# EAGLE board Microsecond clock LEDs (EAGLE 9.5.2)
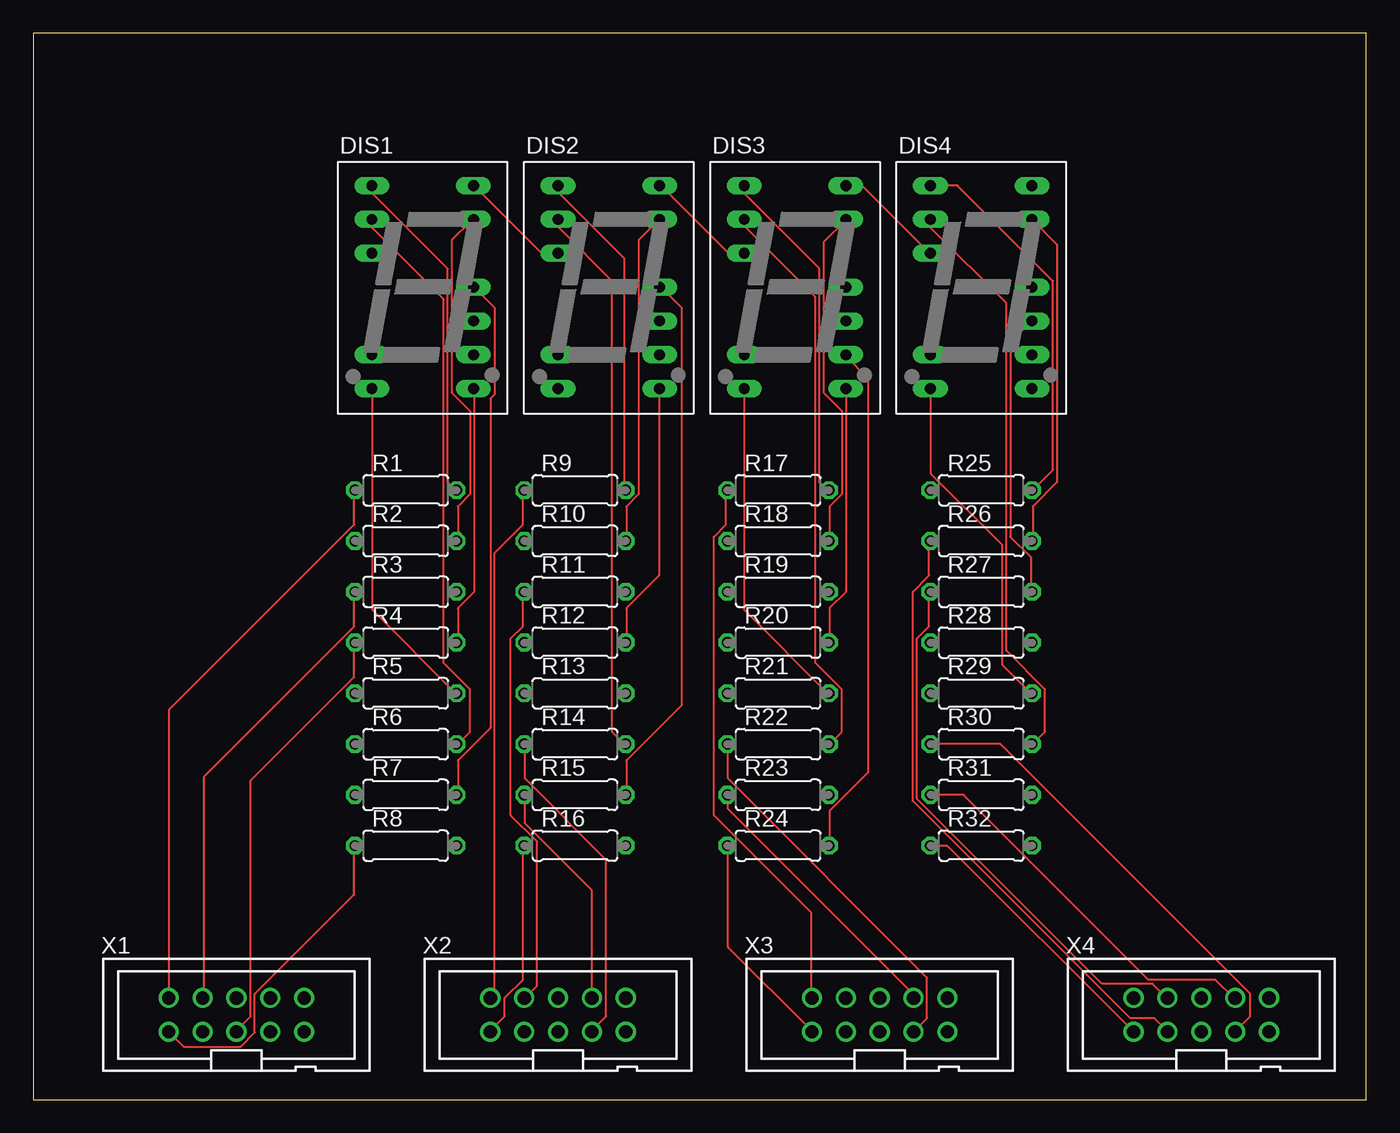
[diagram p0: board, top side]
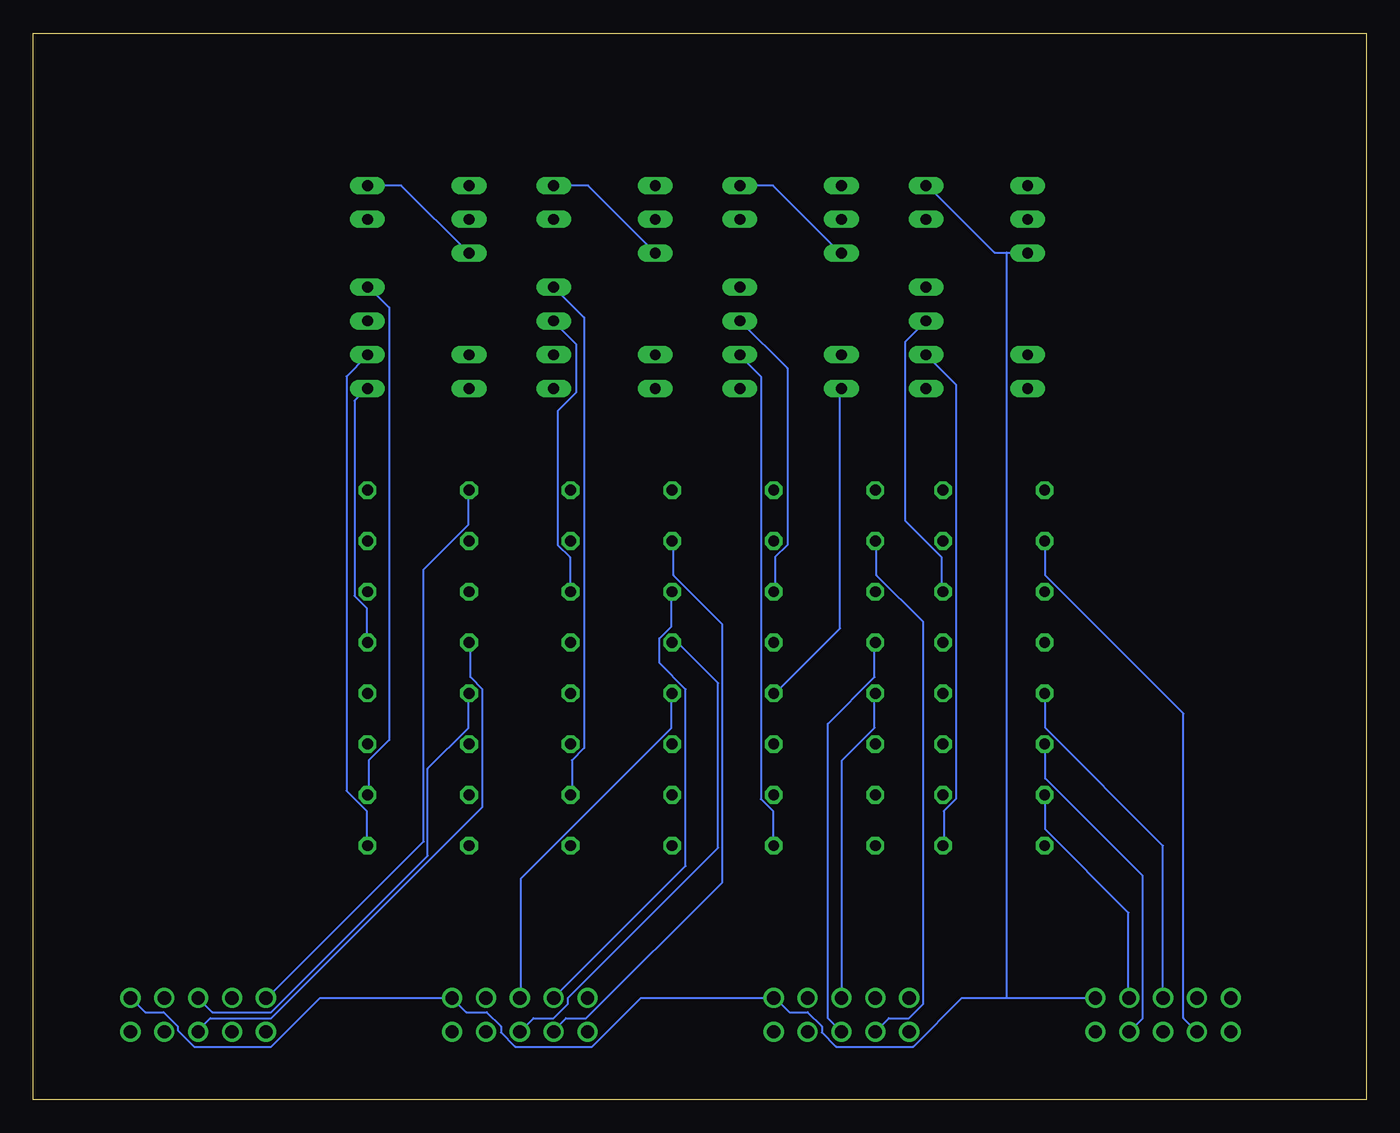
[diagram p1: board, bottom side, seen from below]

Size 100 x 80 mm. Coordinates in mm from the lower left corner, seen from the top.
Outline: 0,0 100,0 100,80 0,80 0,0
Copper layers (1*16): Top 0.035mm / dielectric 1.5mm / Bottom 0.035mm
Design rules "default": minimum track width 6mil, minimum drill 0.35mm, track to track 6mil, track to pad 6mil, pad to pad 6mil, via to via 6mil, smd to smd 6mil, copper to edge 40mil, drill to drill 6mil, minimum pad ring 10mil, minimum via ring 8mil, stop-mask expansion 4mil, vias tented up to drill 0mil, thermal gap 10mil

## Footprints (pad centres in the part's own frame; a part is rotated, then mirrored left to right if it is on the bottom)
HDSP-I = drill 0.813 long: 1 -3.81,7.62; 2 -3.81,5.08; 3 -3.81,2.54; 6 -3.81,-5.08; 7 -3.81,-7.62; 8 3.81,-7.62; 9 3.81,-5.08; 10 3.81,-2.54; 11 3.81,0; 13 3.81,5.08; 14 3.81,7.62
0207/7 = drill 0.813 octagon: 1 -3.81,0; 2 3.81,0
PAK100/2500-10 = drill 1 pad 1.422: 1 -5.08,-1.27; 2 -5.08,1.27; 3 -2.54,-1.27; 4 -2.54,1.27; 5 0,-1.27; 6 0,1.27; 7 2.54,-1.27; 8 2.54,1.27; 9 5.08,-1.27; 10 5.08,1.27

## Placement (x,y rotation side)
DIS1  HD-E101  [HDSP-I]  29.21,60.96 0 top
DIS2  HD-E101  [HDSP-I]  43.18,60.96 0 top
DIS3  HD-E101  [HDSP-I]  57.15,60.96 0 top
DIS4  HD-E101  [HDSP-I]  71.12,60.96 0 top
R1  1K  [0207/7]  27.94,45.72 0 top
R2  1k  [0207/7]  27.94,41.91 0 top
R3  1k  [0207/7]  27.94,38.1 0 top
R4  1k  [0207/7]  27.94,34.29 0 top
R5  1k  [0207/7]  27.94,30.48 0 top
R6  1k  [0207/7]  27.94,26.67 0 top
R7  1k  [0207/7]  27.94,22.86 0 top
R8  1K  [0207/7]  27.94,19.05 0 top
R9  1K  [0207/7]  40.64,45.72 0 top
R10  1k  [0207/7]  40.64,41.91 0 top
R11  1k  [0207/7]  40.64,38.1 0 top
R12  1k  [0207/7]  40.64,34.29 0 top
R13  1k  [0207/7]  40.64,30.48 0 top
R14  1k  [0207/7]  40.64,26.67 0 top
R15  1k  [0207/7]  40.64,22.86 0 top
R16  1K  [0207/7]  40.64,19.05 0 top
R17  1K  [0207/7]  55.88,45.72 0 top
R18  1k  [0207/7]  55.88,41.91 0 top
R19  1k  [0207/7]  55.88,38.1 0 top
R20  1k  [0207/7]  55.88,34.29 0 top
R21  1k  [0207/7]  55.88,30.48 0 top
R22  1k  [0207/7]  55.88,26.67 0 top
R23  1k  [0207/7]  55.88,22.86 0 top
R24  1K  [0207/7]  55.88,19.05 0 top
R25  1K  [0207/7]  71.12,45.72 0 top
R26  1k  [0207/7]  71.12,41.91 0 top
R27  1k  [0207/7]  71.12,38.1 0 top
R28  1k  [0207/7]  71.12,34.29 0 top
R29  1k  [0207/7]  71.12,30.48 0 top
R30  1k  [0207/7]  71.12,26.67 0 top
R31  1k  [0207/7]  71.12,22.86 0 top
R32  1K  [0207/7]  71.12,19.05 0 top
X1  2510-  [PAK100/2500-10]  15.24,6.35 0 top
X2  2510-  [PAK100/2500-10]  39.37,6.35 0 top
X3  2510-  [PAK100/2500-10]  63.5,6.35 0 top
X4  2510-  [PAK100/2500-10]  87.63,6.35 0 top

## Library data of the parts
DIS1-DIS4 = display-hp; OC_FARNELL: unknown; OC_NEWARK: unknown
R1-R32 = rcl; SPICEPREFIX: R
X1-X4 = con-3m; MF: 3M; MPN: 2510-6002UB; OC_FARNELL: 9838244; OC_NEWARK: 46F4725

## Nets
0: DIS1.3 DIS1.14 DIS2.3 DIS2.14 DIS3.3 DIS3.14 DIS4.3 DIS4.14 X1.10 X2.10 X3.10 X4.10
N$1: DIS1.1 R1.2
N$2: DIS1.13 R2.2
N$3: DIS1.10 R3.2
N$4: DIS1.8 R4.2
N$5: DIS1.7 R5.2
N$6: DIS1.2 R6.2
N$7: DIS1.11 R7.2
N$8: DIS1.9 R8.2
N$9: R8.1 X1.1
N$10: R1.1 X1.2
N$11: R2.1 X1.3
N$12: R3.1 X1.4
N$13: R4.1 X1.5
N$14: R5.1 X1.6
N$15: R6.1 X1.7
N$16: R7.1 X1.8
N$17: DIS2.1 R9.2
N$18: DIS2.13 R10.2
N$19: DIS2.10 R11.2
N$20: DIS2.8 R12.2
N$21: DIS2.7 R13.2
N$22: DIS2.2 R14.2
N$23: DIS2.11 R15.2
N$24: DIS2.9 R16.2
N$25: R16.1 X2.1
N$26: R9.1 X2.2
N$27: R10.1 X2.3
N$28: R11.1 X2.4
N$29: R12.1 X2.5
N$30: R13.1 X2.6
N$31: R14.1 X2.7
N$32: R15.1 X2.8
N$33: DIS3.1 R17.2
N$34: DIS3.13 R18.2
N$35: DIS3.10 R19.2
N$36: DIS3.8 R20.2
N$37: DIS3.7 R21.2
N$38: DIS3.2 R22.2
N$39: DIS3.11 R23.2
N$40: DIS3.9 R24.2
N$41: R24.1 X3.1
N$42: R17.1 X3.2
N$43: R18.1 X3.3
N$44: R19.1 X3.4
N$45: R20.1 X3.5
N$46: R21.1 X3.6
N$47: R22.1 X3.7
N$48: R23.1 X3.8
N$49: DIS4.1 R25.2
N$50: DIS4.13 R26.2
N$51: DIS4.10 R27.2
N$52: DIS4.8 R28.2
N$53: DIS4.7 R29.2
N$54: DIS4.2 R30.2
N$55: DIS4.11 R31.2
N$56: DIS4.9 R32.2
N$57: R32.1 X4.1
N$58: R25.1 X4.2
N$59: R26.1 X4.3
N$60: R27.1 X4.4
N$61: R28.1 X4.5
N$62: R29.1 X4.6
N$63: R30.1 X4.7
N$64: R31.1 X4.8

## Tracks (layer width: path | path; a pad name or v marks a point on that pad's centre or on a via)
0
  Top 0.152: DIS3.14 62.18,68.58 67.21,63.55 DIS4.3 | DIS3.3 53.34,63.55 52.12,63.55 47.09,68.58 DIS2.14 | DIS2.3 39.32,63.55 38.1,63.55 33.07,68.58 DIS1.14
  Bottom 0.152: DIS4.14 72.39,68.58 DIS4.3 | 26.98,63.55 27.89,63.55 32.92,68.58 DIS1.14 | 26.98,63.55 25.45,63.55 DIS1.3 | DIS2.14 44.5,68.58 39.47,63.55 DIS2.3 | DIS3.14 58.37,68.58 53.34,63.55 DIS3.3 | 26.98,7.62 30.33,7.62 33.98,3.96 39.78,3.96 40.84,5.03 40.84,5.49 41.91,6.55 43.28,6.55 44.35,7.62 X2.10 54.41,7.62 58.06,3.96 63.86,3.96 64.92,5.03 64.92,5.49 65.99,6.55 67.51,6.55 X3.10 78.49,7.62 82.14,3.96 87.94,3.96 89.15,5.18 89.15,5.49 90.22,6.55 91.59,6.55 92.66,7.62 X4.10 | 26.98,7.62 X1.10 | 26.98,7.62 26.98,63.55
N$1
  Top 0.152: DIS1.1 25.45,68.58 25.45,67.97 31.09,62.33 31.09,46.33 31.7,45.72 R1.2
N$2
  Top 0.152: R2.2 31.85,41.91 31.85,44.5 32.77,45.41 32.77,51.66 31.39,53.03 31.39,64.47 32.92,65.99 DIS1.13
N$3
  Bottom 0.152: DIS1.10 34.59,56.84 34.59,43.43 31.85,40.69 31.85,38.1 R3.2
N$4
  Top 0.152: R4.2 31.85,34.29 31.85,36.88 33.07,38.1 33.07,53.34 DIS1.8
N$5
  Top 0.152: DIS1.7 25.45,53.34 25.45,36.73 31.7,30.48 R5.2
N$6
  Top 0.152: DIS1.2 25.45,65.99 25.45,65.38 30.79,60.05 30.79,32.77 32.77,30.79 32.77,27.58 31.85,26.67 R6.2
N$7
  Top 0.152: R7.2 31.85,22.86 31.85,25.45 34.29,27.89 34.29,52.58 34.59,52.88 34.59,59.44 33.07,60.96 DIS1.11
N$8
  Bottom 0.152: DIS1.9 30.79,53.65 30.79,22.55 31.7,21.64 31.7,19.05 R8.2
N$9
  Top 0.152: X1.1 11.28,3.96 15.54,3.96 16.61,5.03 16.61,7.92 24.08,15.39 24.08,19.05 R8.1
N$10
  Top 0.152: R1.1 24.08,45.72 24.08,43.13 10.21,29.26 10.21,7.62 X1.2
N$11
  Bottom 0.152: X1.3 13.72,6.1 13.72,28.96 24.08,39.32 24.08,41.91 R2.1
N$12
  Top 0.152: R3.1 24.08,38.1 24.08,35.51 12.8,24.23 12.8,7.62 X1.4
N$13
  Top 0.152: R4.1 24.08,34.29 24.08,31.7 16.31,23.93 16.31,6.25 15.24,5.18 X1.5
N$14
  Bottom 0.152: X1.6 15.24,19.05 24.08,27.89 24.08,30.48 R5.1
N$15
  Bottom 0.152: X1.7 16.76,6.1 16.76,16.76 24.08,24.08 24.08,26.67 R6.1
N$16
  Bottom 0.152: R7.1 24.08,22.86 24.08,20.27 17.83,14.02 17.83,7.62 X1.8
N$17
  Top 0.152: DIS2.1 39.47,68.58 39.47,67.97 44.35,63.09 44.35,45.72 R9.2
N$18
  Top 0.152: DIS2.13 45.41,64.47 45.41,45.41 44.5,44.5 44.5,41.91 R10.2
N$19
  Bottom 0.152: DIS2.10 43.43,54.86 43.43,41.6 44.35,40.69 44.35,38.1 R11.2
N$20
  Top 0.152: R12.2 44.5,34.29 44.5,36.88 46.94,39.32 46.94,53.34 DIS2.8
N$21
  Bottom 0.152: DIS2.7 39.47,53.34 39.47,35.36 44.35,30.48 R13.2
N$22
  Top 0.152: DIS2.2 39.47,65.99 39.47,65.38 43.43,61.42 43.43,27.58 44.35,26.67 R14.2
N$23
  Top 0.152: R15.2 44.5,22.86 44.5,25.45 48.62,29.57 48.62,59.44 47.09,60.96 DIS2.11
N$24
  Bottom 0.152: R16.2 44.5,19.05 44.5,21.64 45.41,22.55 45.41,54.25 46.94,55.78 DIS2.9
N$25
  Top 0.152: R16.1 36.73,19.05 36.73,8.99 35.36,7.62 35.36,6.25 34.29,5.18 X2.1
N$26
  Top 0.152: X2.2 34.59,7.92 34.59,41 36.73,43.13 36.73,45.72 R9.1
N$27
  Bottom 0.152: X2.3 35.81,6.1 34.29,6.1 33.22,7.16 33.22,35.81 36.73,39.32 36.73,41.91 R10.1
N$28
  Top 0.152: R11.1 36.73,38.1 36.73,35.51 35.81,34.59 35.81,21.34 37.8,19.36 37.8,8.53 36.88,7.62 X2.4
N$29
  Bottom 0.152: X2.5 40.39,6.1 40.39,28.19 36.88,31.7 36.88,34.29 R12.1
N$30
  Bottom 0.152: R13.1 36.88,30.48 36.88,27.89 39.32,25.45 39.32,7.62 X2.6
N$31
  Top 0.152: R14.1 36.88,26.67 36.88,24.08 42.98,17.98 42.98,6.25 41.91,5.18 X2.7
N$32
  Top 0.152: X2.8 41.91,15.7 36.88,20.73 36.88,22.86 R15.1
N$33
  Top 0.152: DIS3.1 53.34,67.97 58.98,62.33 58.98,46.33 59.59,45.72 R17.2
N$34
  Top 0.152: R18.2 59.74,41.91 59.74,44.5 60.66,45.41 60.66,51.66 59.28,53.03 59.28,64.31 60.96,65.99 DIS3.13
N$35
  Bottom 0.152: R19.2 59.74,38.1 59.74,40.69 60.66,41.6 60.66,51.66 59.28,53.03 59.28,56.69 60.96,58.37 DIS3.10
N$36
  Top 0.152: DIS3.8 60.96,38.1 59.74,36.88 59.74,34.29 R20.2
N$37
  Top 0.152: DIS3.7 53.34,36.73 59.59,30.48 R21.2
N$38
  Top 0.152: DIS3.2 53.34,65.53 58.67,60.2 58.67,32.77 60.66,30.79 60.66,27.58 59.74,26.67 R22.2
N$39
  Bottom 0.152: DIS3.11 58.67,58.67 58.67,26.36 59.59,25.45 59.59,22.86 R23.2
N$40
  Top 0.152: R24.2 59.74,19.05 59.74,21.64 62.64,24.54 62.64,54.1 60.96,55.78 DIS3.9
N$41
  Top 0.152: R24.1 52.12,19.05 52.12,11.43 58.37,5.18 X3.1
N$42
  Top 0.152: R17.1 51.97,45.72 51.97,43.13 51.05,42.22 51.05,21.34 58.37,14.02 58.37,7.62 X3.2
N$43
  Bottom 0.152: R18.1 51.97,41.91 51.97,39.32 48.31,35.66 48.31,16.31 58.52,6.1 60.05,6.1 60.96,5.18 X3.3
N$44
  Bottom 0.152: X3.4 51.05,17.53 51.05,30.79 53.03,32.77 53.03,34.59 52.12,35.51 52.12,38.1 R19.1
N$45
  Bottom 0.152: R20.1 51.66,34.29 48.62,31.24 48.62,18.9 59.89,7.62 59.89,7.16 60.96,6.1 62.48,6.1 X3.5
N$46
  Bottom 0.152: R21.1 52.12,30.48 52.12,27.89 63.4,16.61 63.4,7.62 X3.6
N$47
  Top 0.152: X3.7 67.06,6.1 67.06,9.14 52.12,24.08 52.12,26.67 R22.1
N$48
  Top 0.152: R23.1 52.12,22.86 52.12,21.79 65.99,7.92 65.99,7.62 X3.8
N$49
  Top 0.152: DIS4.1 69.34,68.58 76.5,61.42 76.5,47.24 74.98,45.72 R25.2
N$50
  Top 0.152: DIS4.13 76.81,64.16 76.81,46.33 74.98,44.5 74.98,41.91 R26.2
N$51
  Top 0.152: R27.2 74.83,38.1 74.83,40.69 73.3,42.22 73.3,56.84 74.83,58.37 DIS4.10
N$52
  Bottom 0.152: R28.2 74.98,34.29 74.98,36.88 75.89,37.8 75.89,52.43 74.98,53.34 DIS4.8
N$53
  Top 0.152: DIS4.7 67.36,53.34 67.36,46.94 72.69,41.6 72.69,32.61 74.83,30.48 R29.2
N$54
  Top 0.152: DIS4.2 67.36,65.99 67.36,65.38 73,59.74 73,33.68 75.89,30.79 75.89,27.58 74.98,26.67 R30.2
N$55
  Bottom 0.152: R31.2 74.83,22.86 74.83,25.45 73.3,26.98 73.3,59.44 74.83,60.96 DIS4.11
N$56
  Bottom 0.152: R32.2 74.98,19.05 74.98,21.64 76.5,23.16 76.5,54.25 74.98,55.78 DIS4.9
N$57
  Top 0.152: R32.1 68.58,19.05 X4.1
N$58
  Bottom 0.152: R25.1 67.36,45.72 67.36,43.13 70.71,39.78 70.71,19.36 82.45,7.62 X4.2
N$59
  Top 0.152: R26.1 67.21,41.91 67.21,39.32 65.99,38.1 65.99,22.4 82.3,6.1 84.12,6.1 85.04,5.18 X4.3
N$60
  Top 0.152: R27.1 67.21,38.1 67.21,35.51 66.29,34.59 66.29,22.55 80.16,8.69 83.97,8.69 85.04,7.62 X4.4
N$61
  Bottom 0.152: R28.1 67.21,34.29 67.21,31.7 66.29,30.79 66.29,21.95 82.14,6.1 86.72,6.1 87.63,5.18 X4.5
N$62
  Bottom 0.152: X4.6 86.56,6.55 82.14,6.55 70.41,18.29 70.41,24.84 67.36,27.89 67.36,30.48 R29.1
N$63
  Top 0.152: R30.1 72.54,26.67 91.29,7.92 91.29,6.25 90.22,5.18 X4.7
N$64
  Top 0.152: R31.1 69.8,22.86 83.67,8.99 88.7,8.99 90.07,7.62 X4.8